# EAGLE board VISUB_V1 (EAGLE 9.2.2)
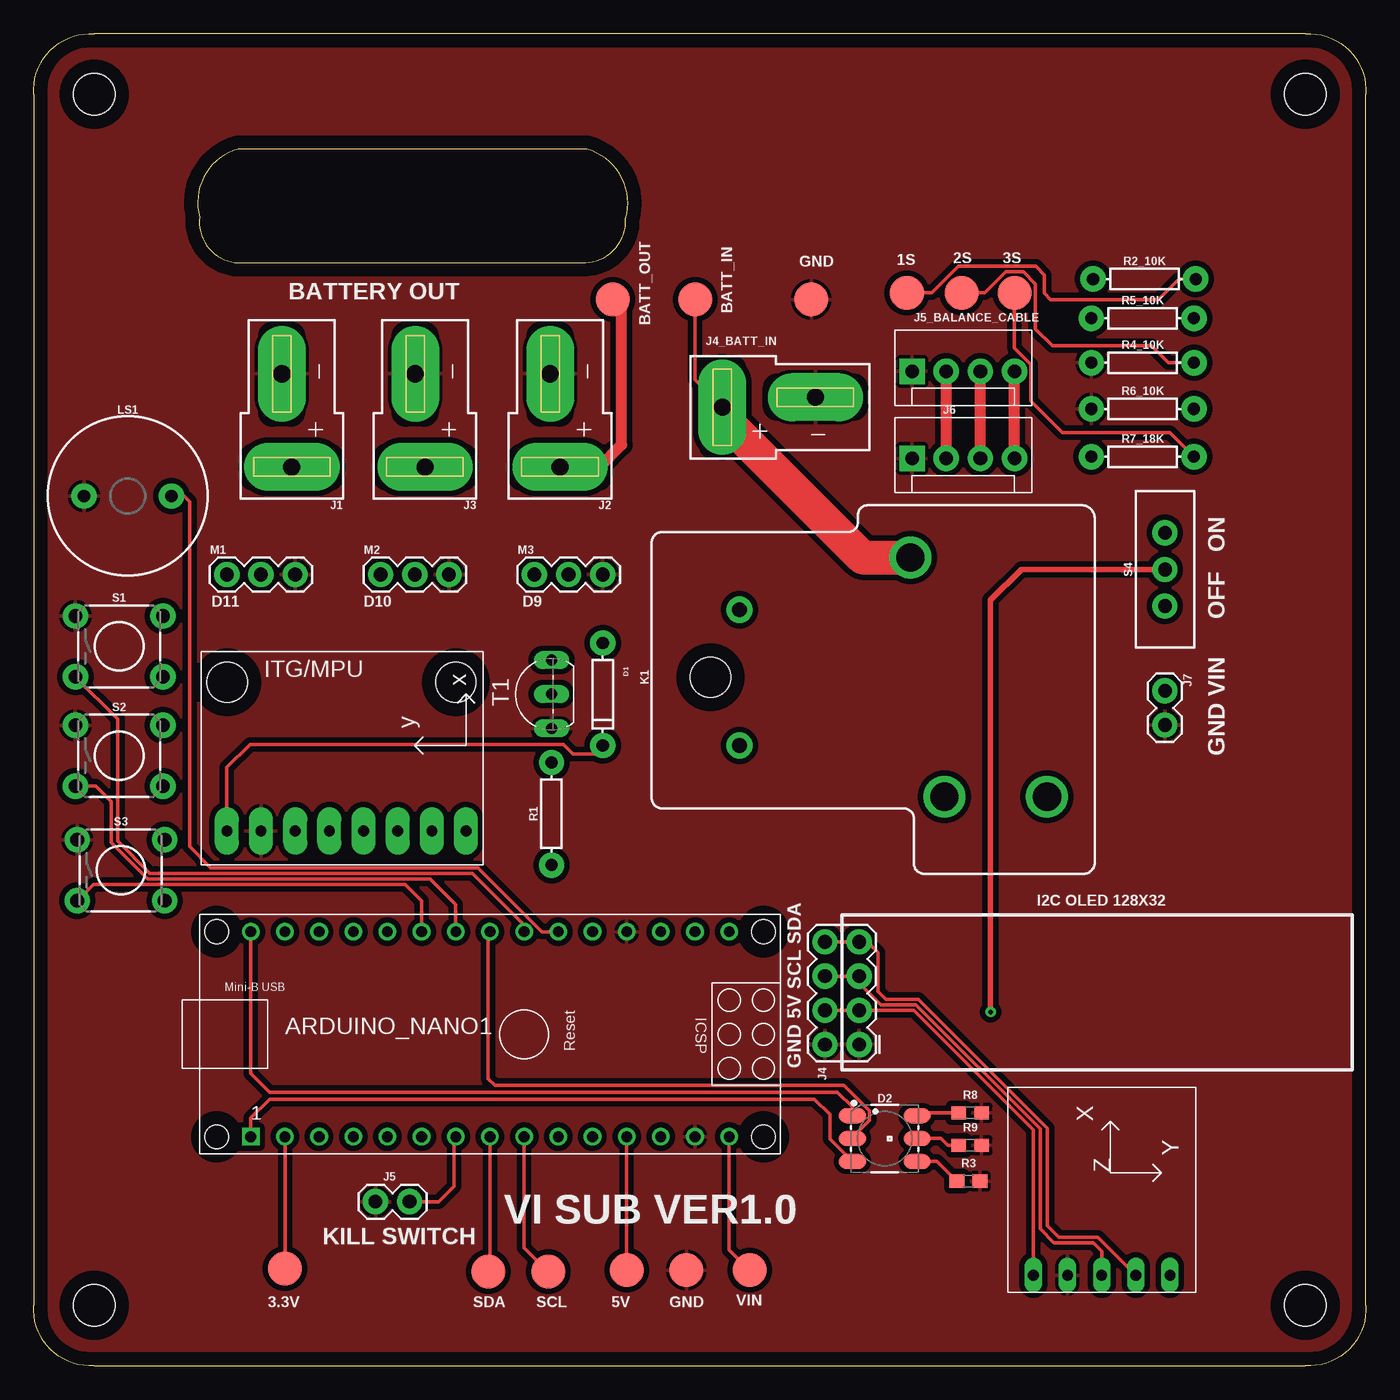
[diagram p0: board, top side]
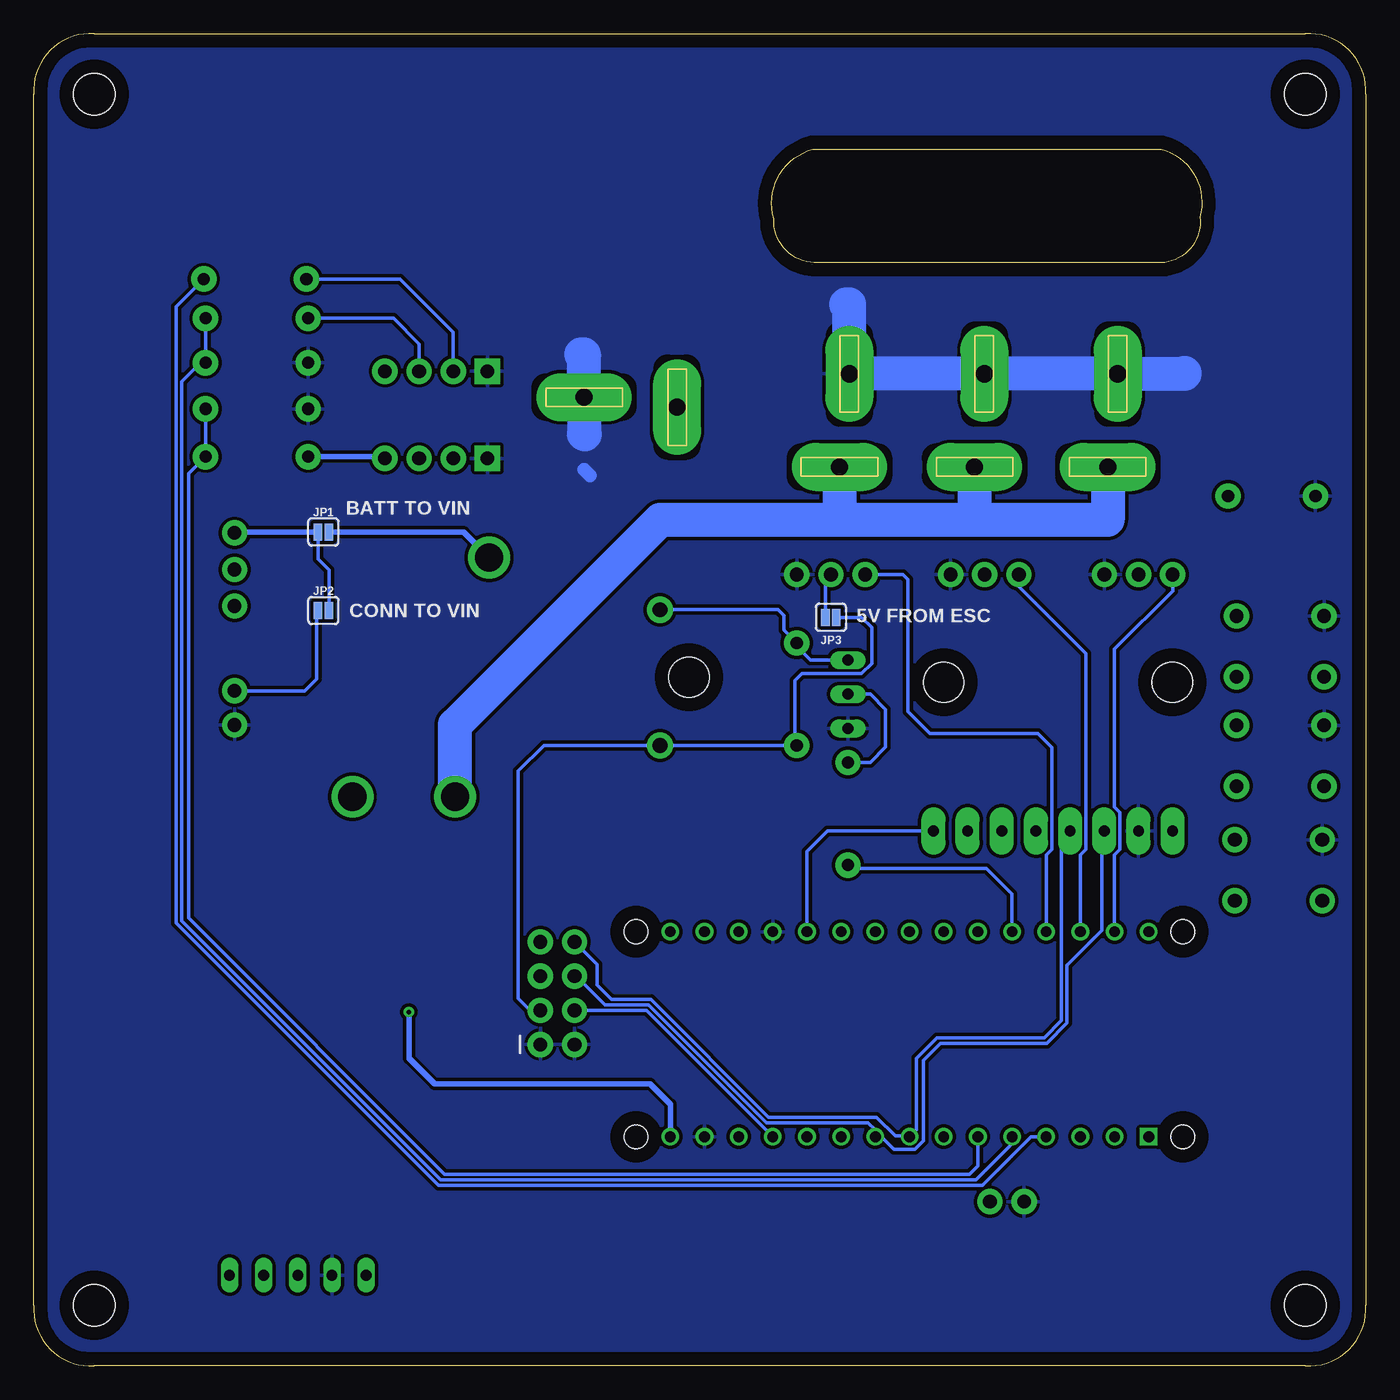
[diagram p1: board, bottom side, seen from below]

Size 99.02 x 99.02 mm. Coordinates in mm from the lower left corner, seen from the top.
Outline: 4.51,0.01 94.51,0.01 arc98 99.01,4.51 99.01,94.51 arc98 94.51,99.01 4.51,99.01 arc98 0.01,94.51 0.01,4.51 arc98 4.51,0.01
Outline: 14.96,82.01 41.01,82.01 arc90 44.01,85.23 44.01,85.28 arc90 41.14,90.42 15.19,90.42 arc90 12.34,85.39 arc90 14.96,82.01
Copper layers (1*16): Top 0.035mm / dielectric 1.5mm / Bottom 0.035mm
Design rules "default": minimum track width 6mil, minimum drill 0.35mm, track to track 6mil, track to pad 6mil, pad to pad 6mil, via to via 6mil, smd to smd 6mil, copper to edge 40mil, drill to drill 6mil, minimum pad ring 10mil, minimum via ring 8mil, stop-mask expansion 4mil, vias tented up to drill 0mil, thermal gap 10mil
Holes 3.1 mm at 4.51,4.51 94.51,4.51 94.51,94.51 4.51,94.51
Holes 3 mm at 50.31,51.19 31.39,50.81 14.39,50.81

## Footprints (pad centres in the part's own frame; a part is rotated, then mirrored left to right if it is on the bottom)
ARDUINO_NANO = drill 0.8 square: 1 -20.32,-7.62 | drill 0.8: 2 -17.78,-7.62; 3 -15.24,-7.62; 4 -12.7,-7.62; 5 -10.16,-7.62; 6 -7.62,-7.62; 7 -5.08,-7.62; 8 -2.54,-7.62; 9 0,-7.62; 10 2.54,-7.62; 11 5.08,-7.62; 12 7.62,-7.62; 13 10.16,-7.62; 14 12.7,-7.62; 15 15.24,-7.62; 16 15.24,7.62; 17 12.7,7.62; 18 10.16,7.62; 19 7.62,7.62; 20 5.08,7.62; 21 2.54,7.62; 22 0,7.62; 23 -2.54,7.62; 24 -5.08,7.62; 25 -7.62,7.62; 26 -10.16,7.62; 27 -12.7,7.62; 28 -15.24,7.62; 29 -17.78,7.62; 30 -20.32,7.62 | hole 1.778: -22.86,-7.62; -22.86,7.62; 17.78,7.62; 17.78,-7.62
DIODE-1N4148 = drill 0.9 pad 1.88: A -3.81,0; C 3.81,0
LED-TRICOLOR-5050 = smd 2 x 1.1: 1 -2.4,1.7; 2 -2.4,0; 3 -2.4,-1.7; 4 2.4,-1.7; 5 2.4,0; 6 2.4,1.7
DEANS = drill 1.27 pad 3.556 long: + 0,0; - 0.737,-6.921
2X4 = drill 1.016 pad 1.88: 1 -3.81,-1.27; 2 -3.81,1.27; 3 -1.27,-1.27; 4 -1.27,1.27; 5 1.27,-1.27; 6 1.27,1.27; 7 3.81,-1.27; 8 3.81,1.27
1X02 = drill 1.016 pad 1.88: 1 0,0; 2 2.54,0
MOLEX-1X4 = drill 1.016 pad 1.88 square: 1 0,0 | drill 1.016 pad 1.88: 2 2.54,0; 3 5.08,0; 4 7.62,0
SMT-JUMPER_2_NC_PASTE_SILK = smd 0.635 x 1.27: 1 -0.406,0; 2 0.406,0
RELAY-T90 = drill 1.1 pad 1.956: COIL1 0,-13.9; COIL2 0,-3.81 | drill 2.1: MAIN -12.7,-17.78; NC -22.86,0; NO -15.24,0
BUZZER-12MM-KIT = drill 0.9 pad 1.88: + 3.25,0; - -3.25,0
1X03 = drill 1.016 pad 1.88: 1 0,0; 2 2.54,0; 3 5.08,0
AXIAL-0.3 = drill 0.9 pad 1.88: P$1 -3.81,0; P$2 3.81,0
0603 = smd 1.1 x 1: 1 -0.85,0; 2 0.85,0
TACTILE_SWITCH_PTH_6.0MM = drill 1.016 pad 1.88: 1 -3.251,2.261; 2 3.251,2.261; 3 -3.251,-2.261; 4 3.251,-2.261
SWITCH_SPDT_PTH_11.6X4.0MM_LOCK = drill 1.016 pad 1.88: 1 0,2.718; 2 0,0; 3 0,-2.718
TO92-EBC-OVAL = drill 0.813 long: B 0,-1.27; C 2.54,-1.27; E -2.54,-1.27
TESTPAD_B2,54 = smd 2.54 x 2.54: TP 0,0
GY-521 = drill 0.8 pad 1.778 long: ADO -8.89,-6.35; GND -8.89,6.35; INT -8.89,-8.89; SCL -8.89,3.81; SDA -8.89,1.27; VCC -8.89,8.89; XCL -8.89,-3.81; XDA -8.89,-1.27
GY-271 = drill 0.8 long: DRDY -6.35,-4.445; GND -6.35,3.175; SCL -6.35,0.635; SDA -6.35,-1.905; VCC -6.35,5.715

## Placement (x,y rotation side)
ARDUINO_NANO1  [ARDUINO_NANO]  36.46,24.65 0 top
D1  [DIODE-1N4148]  42.3,49.92 270 top
D2  [LED-TRICOLOR-5050]  63.25,16.9 0 top
J1  [DEANS]  19.19,66.81 180 top
J2  [DEANS]  39.12,66.81 180 top
J3  [DEANS]  29.09,66.81 180 top
J4  [2X4]  60.08,27.69 90 top
J4_BATT_IN  [DEANS]  51.19,71.26 90 top
J5  [1X02]  27.95,12.2 180 top
J5_BALANCE_CABLE  [MOLEX-1X4]  65.29,73.92 0 top
J6  [MOLEX-1X4]  65.29,67.45 0 top
J7  [1X02]  84.08,50.17 270 top
JP1  JUMPER-SMT_2_NC_PASTE_SILK  [SMT-JUMPER_2_NC_PASTE_SILK]  77.48,61.98 0 bottom
JP2  JUMPER-SMT_2_NC_PASTE_SILK  [SMT-JUMPER_2_NC_PASTE_SILK]  77.48,56.14 0 bottom
JP3  JUMPER-SMT_2_NC_PASTE_SILK  [SMT-JUMPER_2_NC_PASTE_SILK]  39.76,55.63 180 bottom
K1  RELAY-SPDT-JQX-15F  [RELAY-T90]  52.46,42.3 180 top
LS1  BUZZER-PTH_KIT  [BUZZER-12MM-KIT]  6.99,64.65 0 top
M1  SERVO  [1X03]  14.36,58.81 0 top
M2  SERVO  [1X03]  25.79,58.81 0 top
M3  SERVO  [1X03]  37.22,58.81 0 top
R1  1k  [AXIAL-0.3]  38.49,41.03 90 top
R2_10K  10k  [AXIAL-0.3]  82.56,80.78 0 top
R3  1k  [0603]  69.48,13.72 0 top
R4_10K  10k  [AXIAL-0.3]  82.43,74.56 0 top
R5_10K  10k  [AXIAL-0.3]  82.43,77.86 0 top
R6_10K  10k  [AXIAL-0.3]  82.43,71.13 0 top
R7_18K  18k  [AXIAL-0.3]  82.43,67.57 0 top
R8  1k  [0603]  69.6,18.8 0 top
R9  1k  [0603]  69.6,16.39 0 top
S1  MOMENTARY-SWITCH-SPST-PTH-6.0MM  [TACTILE_SWITCH_PTH_6.0MM]  6.36,53.48 0 top
S2  MOMENTARY-SWITCH-SPST-PTH-6.0MM  [TACTILE_SWITCH_PTH_6.0MM]  6.36,45.35 0 top
S3  MOMENTARY-SWITCH-SPST-PTH-6.0MM  [TACTILE_SWITCH_PTH_6.0MM]  6.49,36.84 0 top
S4  [SWITCH_SPDT_PTH_11.6X4.0MM_LOCK]  84.08,59.19 0 top
T1  2N2222  [TO92-EBC-OVAL]  37.22,49.92 90 top
TP1  TESTPAD_TPSQB2,54  [TESTPAD_B2,54]  49.16,79.26 0 top
TP2  TESTPAD_TPSQB2,54  [TESTPAD_B2,54]  44.08,7.12 0 top
TP3  TESTPAD_TPSQB2,54  [TESTPAD_B2,54]  48.52,7.12 0 top
TP4  TESTPAD_TPSQB2,54  [TESTPAD_B2,54]  53.22,7.12 0 top
TP5  TESTPAD_TPSQB2,54  [TESTPAD_B2,54]  33.79,6.99 0 top
TP6  TESTPAD_TPSQB2,54  [TESTPAD_B2,54]  38.24,6.99 0 top
TP7  TESTPAD_TPSQB2,54  [TESTPAD_B2,54]  72.91,79.76 0 top
TP8  TESTPAD_TPSQB2,54  [TESTPAD_B2,54]  68.97,79.76 0 top
TP9  TESTPAD_TPSQB2,54  [TESTPAD_B2,54]  64.91,79.76 0 top
TP10  TESTPAD_TPSQB2,54  [TESTPAD_B2,54]  57.79,79.26 0 top
TP11  TESTPAD_TPSQB2,54  [TESTPAD_B2,54]  18.68,7.25 0 top
TP12  TESTPAD_TPSQB2,54  [TESTPAD_B2,54]  43.06,79.26 0 top
U1  GY-521MPU6050  [GY-521]  23.25,48.65 90 top
U2  HMC5883LGY-271  [GY-271]  80.02,13.09 90 top

## Library data of the parts
ARDUINO_NANO1 = ArduinoNanoV30
D1 TP1-TP12 = BeagleBone_Blue_R3
D2 = SparkFun-LED; PROD_ID: DIO-10298
J1-J3 J4_BATT_IN = SparkFun-Connectors; SF_ID: PRT-11864
J4 J5 J7 = SparkFun-Connectors
J5_BALANCE_CABLE J6 = SparkFun-Connectors; PROD_ID: CONN-08186; SF_ID: PRT-08231
JP1-JP3 = SparkFun-Jumpers
K1 = SparkFun-Electromechanical; PROD_ID: COMP-10736; SF_SKU: COM-10924
LS1 = SparkFun-Electromechanical; PROD_ID: COMP-08253; SF_SKU: COM-07950
M1-M3 = SparkFun-Electromechanical
R1 R2_10K R4_10K R5_10K R6_10K R7_18K = SparkFun-Resistors; PROD_ID: RES-08380
R3 R8 R9 = SparkFun-Resistors; PROD_ID: RES-07856
S1-S3 = SparkFun-Switches; PROD_ID: SWCH-08441; SF_SKU: COM-00097
S4 = SparkFun-Switches; PROD_ID: SWCH-08261; SF_SKU: COM-00102
T1 = adafruit
U1 = gy-521
U2 = hmc5883l

## Nets
1S: ARDUINO_NANO1.4 R2_10K.P$2 TP9.TP
2S: ARDUINO_NANO1.5 R4_10K.P$2 R5_10K.P$2 TP8.TP
3.3V: ARDUINO_NANO1.2 TP11.TP
3S: ARDUINO_NANO1.6 R6_10K.P$2 R7_18K.P$2 TP7.TP
5V: ARDUINO_NANO1.12 D1.C J4.3 J4.4 JP3.1 K1.COIL2 TP2.TP U1.VCC U2.VCC
12V: J4_BATT_IN.+ JP1.2 K1.MAIN TP1.TP
BATT_OUT: J1.+ J2.+ J3.+ K1.NO TP12.TP
D2: ARDUINO_NANO1.20 U1.INT
D3: ARDUINO_NANO1.21 LS1.+
D5: ARDUINO_NANO1.23 D2.2
D8: ARDUINO_NANO1.26 R1.P$1
D9: ARDUINO_NANO1.27 M3.1
D10: ARDUINO_NANO1.28 M2.1
D11: ARDUINO_NANO1.29 M1.1
D12: ARDUINO_NANO1.30 D2.1
GND: ARDUINO_NANO1.14 ARDUINO_NANO1.19 J1.- J2.- J3.- J4.1 J4.2 J4_BATT_IN.- J5.2 J5_BALANCE_CABLE.1 J6.1 J7.2 LS1.- M1.3 M2.3 M3.3 R3.2 R4_10K.P$1 R6_10K.P$1 R8.2 R9.2 S1.1 S2.1 S3.1 T1.E TP3.TP TP10.TP U1.GND U2.GND
N$1: J7.1 JP2.1
N$2: D1.A K1.COIL1 T1.C
N$3: R1.P$2 T1.B
N$4: JP3.2 M3.2
N$5: ARDUINO_NANO1.7 J5.1
N$12: J5_BALANCE_CABLE.2 J6.2 R2_10K.P$1
N$16: J5_BALANCE_CABLE.4 J6.4 R7_18K.P$1
N$17: J5_BALANCE_CABLE.3 J6.3 R5_10K.P$1
N$19: ARDUINO_NANO1.22 S1.3
N$20: ARDUINO_NANO1.25 S3.3
N$21: ARDUINO_NANO1.24 S2.3
N$23: JP1.1 JP2.2 S4.1
N$26: ARDUINO_NANO1.1 D2.3
N$27: D2.4 R3.1
N$28: D2.6 R8.1
N$29: D2.5 R9.1
SCL: ARDUINO_NANO1.9 J4.5 J4.6 TP6.TP U1.SCL U2.SCL
SDA: ARDUINO_NANO1.8 J4.7 J4.8 TP5.TP U1.SDA U2.SDA
VIN: ARDUINO_NANO1.15 S4.2 TP4.TP

## Tracks (layer width: path | path; a pad name or v marks a point on that pad's centre or on a via)
1S
  Top 0.254: TP9.TP 66.78,79.76 68.73,81.72 74.48,81.72 75.12,81.08 75.12,79.71 75.57,79.26 83.57,79.26 85.1,80.78 R2_10K.P$2
  Bottom 0.254: R2_10K.P$2 88.43,78.72 88.43,32.92 68.93,13.42 28.51,13.42 24.9,17.03 ARDUINO_NANO1.4
2S
  Top 0.254: TP8.TP 70.72,79.76 72.26,81.31 73.55,81.31 74.46,80.41 74.46,77.07 75.7,75.83 83.07,75.83 84.34,74.56 R4_10K.P$2
  Bottom 0.254: R5_10K.P$2 86.24,74.94 | 86.24,74.94 R4_10K.P$2 | ARDUINO_NANO1.5 26.3,16.52 28.99,13.83 68.76,13.83 88.02,33.09 88.02,73.16 86.24,74.94
3.3V
  Top 0.254: ARDUINO_NANO1.2 TP11.TP
3S
  Top 0.254: TP7.TP 72.91,75.65 74.13,74.43 74.13,71.69 76.46,69.35 84.46,69.35 R7_18K.P$2
  Bottom 0.254: R6_10K.P$2 R7_18K.P$2 87.51,66.3 87.51,33.28 68.46,14.23 29.47,14.23 28.84,14.87 ARDUINO_NANO1.6
5V
  Top 0.254: J4.4 J4.3 65.41,26.42 74.3,17.53 U2.VCC | U1.VCC 14.36,44.46 16.09,46.19 39.38,46.19 40.09,45.47 41.66,45.47 D1.C | ARDUINO_NANO1.12 TP2.TP
  Bottom 0.254: D1.C 42.43,46.11 | 42.43,46.11 K1.COIL2 61.1,46.11 63,44.2 63,27.31 62.11,26.42 J4.3 | ARDUINO_NANO1.12 53.48,26.42 J4.4 | JP3.1 37.47,55.63 36.71,54.87 36.71,52.21 37.47,51.44 41.92,51.44 42.43,50.94 42.43,46.11
12V
  Top 0.254: J4_BATT_IN.+ 49.16,73.29 TP1.TP
  Top 2.54: J4_BATT_IN.+ 51.19,70.49 61.6,60.08 K1.MAIN
  Bottom 0.406: JP1.2 67.06,61.98 K1.MAIN
  Bottom 1.27: J4_BATT_IN.+ 51.19,68.84
BATT_OUT
  Top 0.813: J2.+ 42.05,66.81 43.7,68.46 43.7,78.62 TP12.TP
  Bottom 1.27: J1.+ 19.06,66.68
  Bottom 2.54: K1.NO 67.7,47.63 52.46,62.87 39.12,62.87 | 29.09,62.87 19.19,62.87 J1.+ | 29.09,62.87 39.12,62.87 | J3.+ 29.09,62.87 | J2.+ 39.12,62.87
D2
  Bottom 0.254: U1.INT 40.01,39.76 41.54,38.24 ARDUINO_NANO1.20
D3
  Top 0.254: LS1.+ 11.18,64.65 11.59,64.24 11.59,38.59 13.17,37.02 33.03,37.02 37.78,32.27 ARDUINO_NANO1.21
D5
  Top 0.254: D2.2 60.85,16.98 62.13,18.26 62.13,18.94 60.24,20.84 34.3,20.84 33.79,21.34 33.79,32.14 ARDUINO_NANO1.23
D8
  Bottom 0.254: ARDUINO_NANO1.26 26.3,35.06 28.2,36.97 38.24,36.97 R1.P$1
D9
  Bottom 0.254: ARDUINO_NANO1.27 23.76,37.98 23.35,38.39 23.35,45.96 24.39,47 32.39,47 34.04,48.65 34.04,58.43 34.43,58.81 M3.1
D10
  Bottom 0.254: ARDUINO_NANO1.28 21.22,37.98 20.81,38.39 20.81,52.94 25.79,57.92 M2.1
D11
  Bottom 0.254: ARDUINO_NANO1.29 18.68,37.98 18.27,38.39 18.27,41.13 18.68,41.54 18.68,53.29 14.36,57.61 M1.1
D12
  Top 0.254: D2.1 60.85,19.23 59.76,20.33 17.53,20.33 16.14,21.73 ARDUINO_NANO1.30
GND
  Bottom 1.016: 58.11,66.62 57.67,66.18
  Bottom 2.54: 58.11,75 J4_BATT_IN.- 58.11,69.29 58.05,69.22 | 13.47,73.8 13.47,73.73 J1.- J3.- J2.- 38.39,78.88 38.62,78.88 | 58.3,75.19 58.11,75.19 58.11,75.03
  pour Top (isolate 0.406): -0.88,106.18 106.94,106.18 106.94,-8.5 -0.88,-8.5
  pour Bottom (isolate 0.254, hatched): -5.07,104.78 105.55,104.78 105.55,-5.58 -5.07,-5.58
N$1
  Bottom 0.254: J7.1 78.88,50.17 77.99,51.06 77.99,56.04 JP2.1
N$2
  Bottom 0.254: K1.COIL1 43.7,56.2 43.26,55.76 43.26,54.69 D1.A 42.3,53.48 41.28,52.46 T1.C
N$3
  Bottom 0.254: T1.B 36.84,49.92 35.7,48.78 35.7,45.98 36.84,44.84 R1.P$2
N$4
  Bottom 0.254: M3.2 40.17,58.4 JP3.2
N$5
  Top 0.254: J5.1 30.11,12.2 31.25,13.34 31.25,16.9 ARDUINO_NANO1.7
N$12
  Top 0.813: J6.2 J5_BALANCE_CABLE.2
  Bottom 0.254: J5_BALANCE_CABLE.2 67.83,76.84 71.76,80.78 R2_10K.P$1
N$16
  Top 0.813: J6.4 J5_BALANCE_CABLE.4
  Bottom 0.406: J6.4 73.21,67.57 R7_18K.P$1
N$17
  Top 0.813: J6.3 J5_BALANCE_CABLE.3
  Bottom 0.254: J5_BALANCE_CABLE.3 70.37,75.95 72.27,77.86 R5_10K.P$1
N$19
  Top 0.254: ARDUINO_NANO1.22 36.46,32.77 32.62,36.61 8.64,36.61 6.23,39.02 6.23,48.09 S1.3
N$20
  Top 0.254: ARDUINO_NANO1.25 28.84,34.55 27.59,35.8 4.45,35.8 S3.3
N$21
  Top 0.254: ARDUINO_NANO1.24 31.38,34.3 29.47,36.2 8.47,36.2 5.77,38.9 5.77,41.94 4.63,43.09 S2.3
N$23
  Bottom 0.254: JP2.2 77.07,59.17 77.88,59.98 JP1.1
  Bottom 0.406: JP1.1 84.01,61.98 S4.1
N$26
  Top 0.254: D2.3 59.19,16.86 59.19,18.68 58.05,19.82 17.53,19.82 16.14,18.42 ARDUINO_NANO1.1
N$27
  Top 0.254: R3.1 67.15,15.2 D2.4
N$28
  Top 0.254: R8.1 65.86,18.8 D2.6
N$29
  Top 0.254: R9.1 67.95,16.39 67.45,16.9 D2.5
SCL
  Top 0.254: J4.6 J4.5 61.35,28.46 62.98,26.83 65.58,26.83 74.81,17.6 74.81,10.17 75.83,9.15 78.75,9.15 79.38,8.52 U2.SCL | ARDUINO_NANO1.9 36.46,8.77 TP6.TP
  Bottom 0.254: U1.SCL 19.61,39.59 19.61,32.35 22.21,29.75 22.21,25.49 23.72,23.99 31.63,23.99 32.9,22.72 32.9,16.72 33.53,16.09 35.07,16.09 36,17.03 ARDUINO_NANO1.9 36.46,17.53 37,18.08 44.55,18.08 53.31,26.83 56.55,26.83 58.68,28.96 J4.6
SDA
  Top 0.254: J4.8 J4.7 61.98,31.5 62.75,30.74 62.75,27.82 63.33,27.24 65.75,27.24 75.34,17.64 75.34,10.42 76.21,9.56 79.1,9.56 U2.SDA | ARDUINO_NANO1.8 33.92,7.12 TP5.TP
  Bottom 0.254: U1.SDA 22.61,39.12 22.61,25.66 23.88,24.39 31.89,24.39 33.41,22.87 33.41,17.53 33.85,17.09 | 33.85,17.09 ARDUINO_NANO1.8 | 33.85,17.09 34.98,17.09 36.37,18.48 44.38,18.48 53.14,27.24 56.07,27.24 57.16,28.33 57.16,29.85 J4.8
VIN  (via drill 0.35)
  Top 0.254: ARDUINO_NANO1.15 51.7,8.64 TP4.TP
  Top 0.406: S4.2 73.41,59.19 71.13,56.9 v71.13,26.3
  Bottom 0.406: v71.13,26.3 71.13,22.87 69.22,20.96 53.22,20.96 51.7,19.44 ARDUINO_NANO1.15

## Text on the board
tNames: GND | 1S | 2S | 3S | BATTERY OUT | BATT_IN | BATT_OUT | D11 | D10 | D9 | OFF ON | GND VIN | I2C OLED 128X32 | GND 5V SCL SDA | VI SUB VER1.0 | KILL SWITCH | 3.3V | SDA | SCL | 5V | GND | VIN
bNames: BATT TO VIN | CONN TO VIN | 5V FROM ESC